# EAGLE board schematic_March8 (EAGLE 9.3.0), part 1 of 2
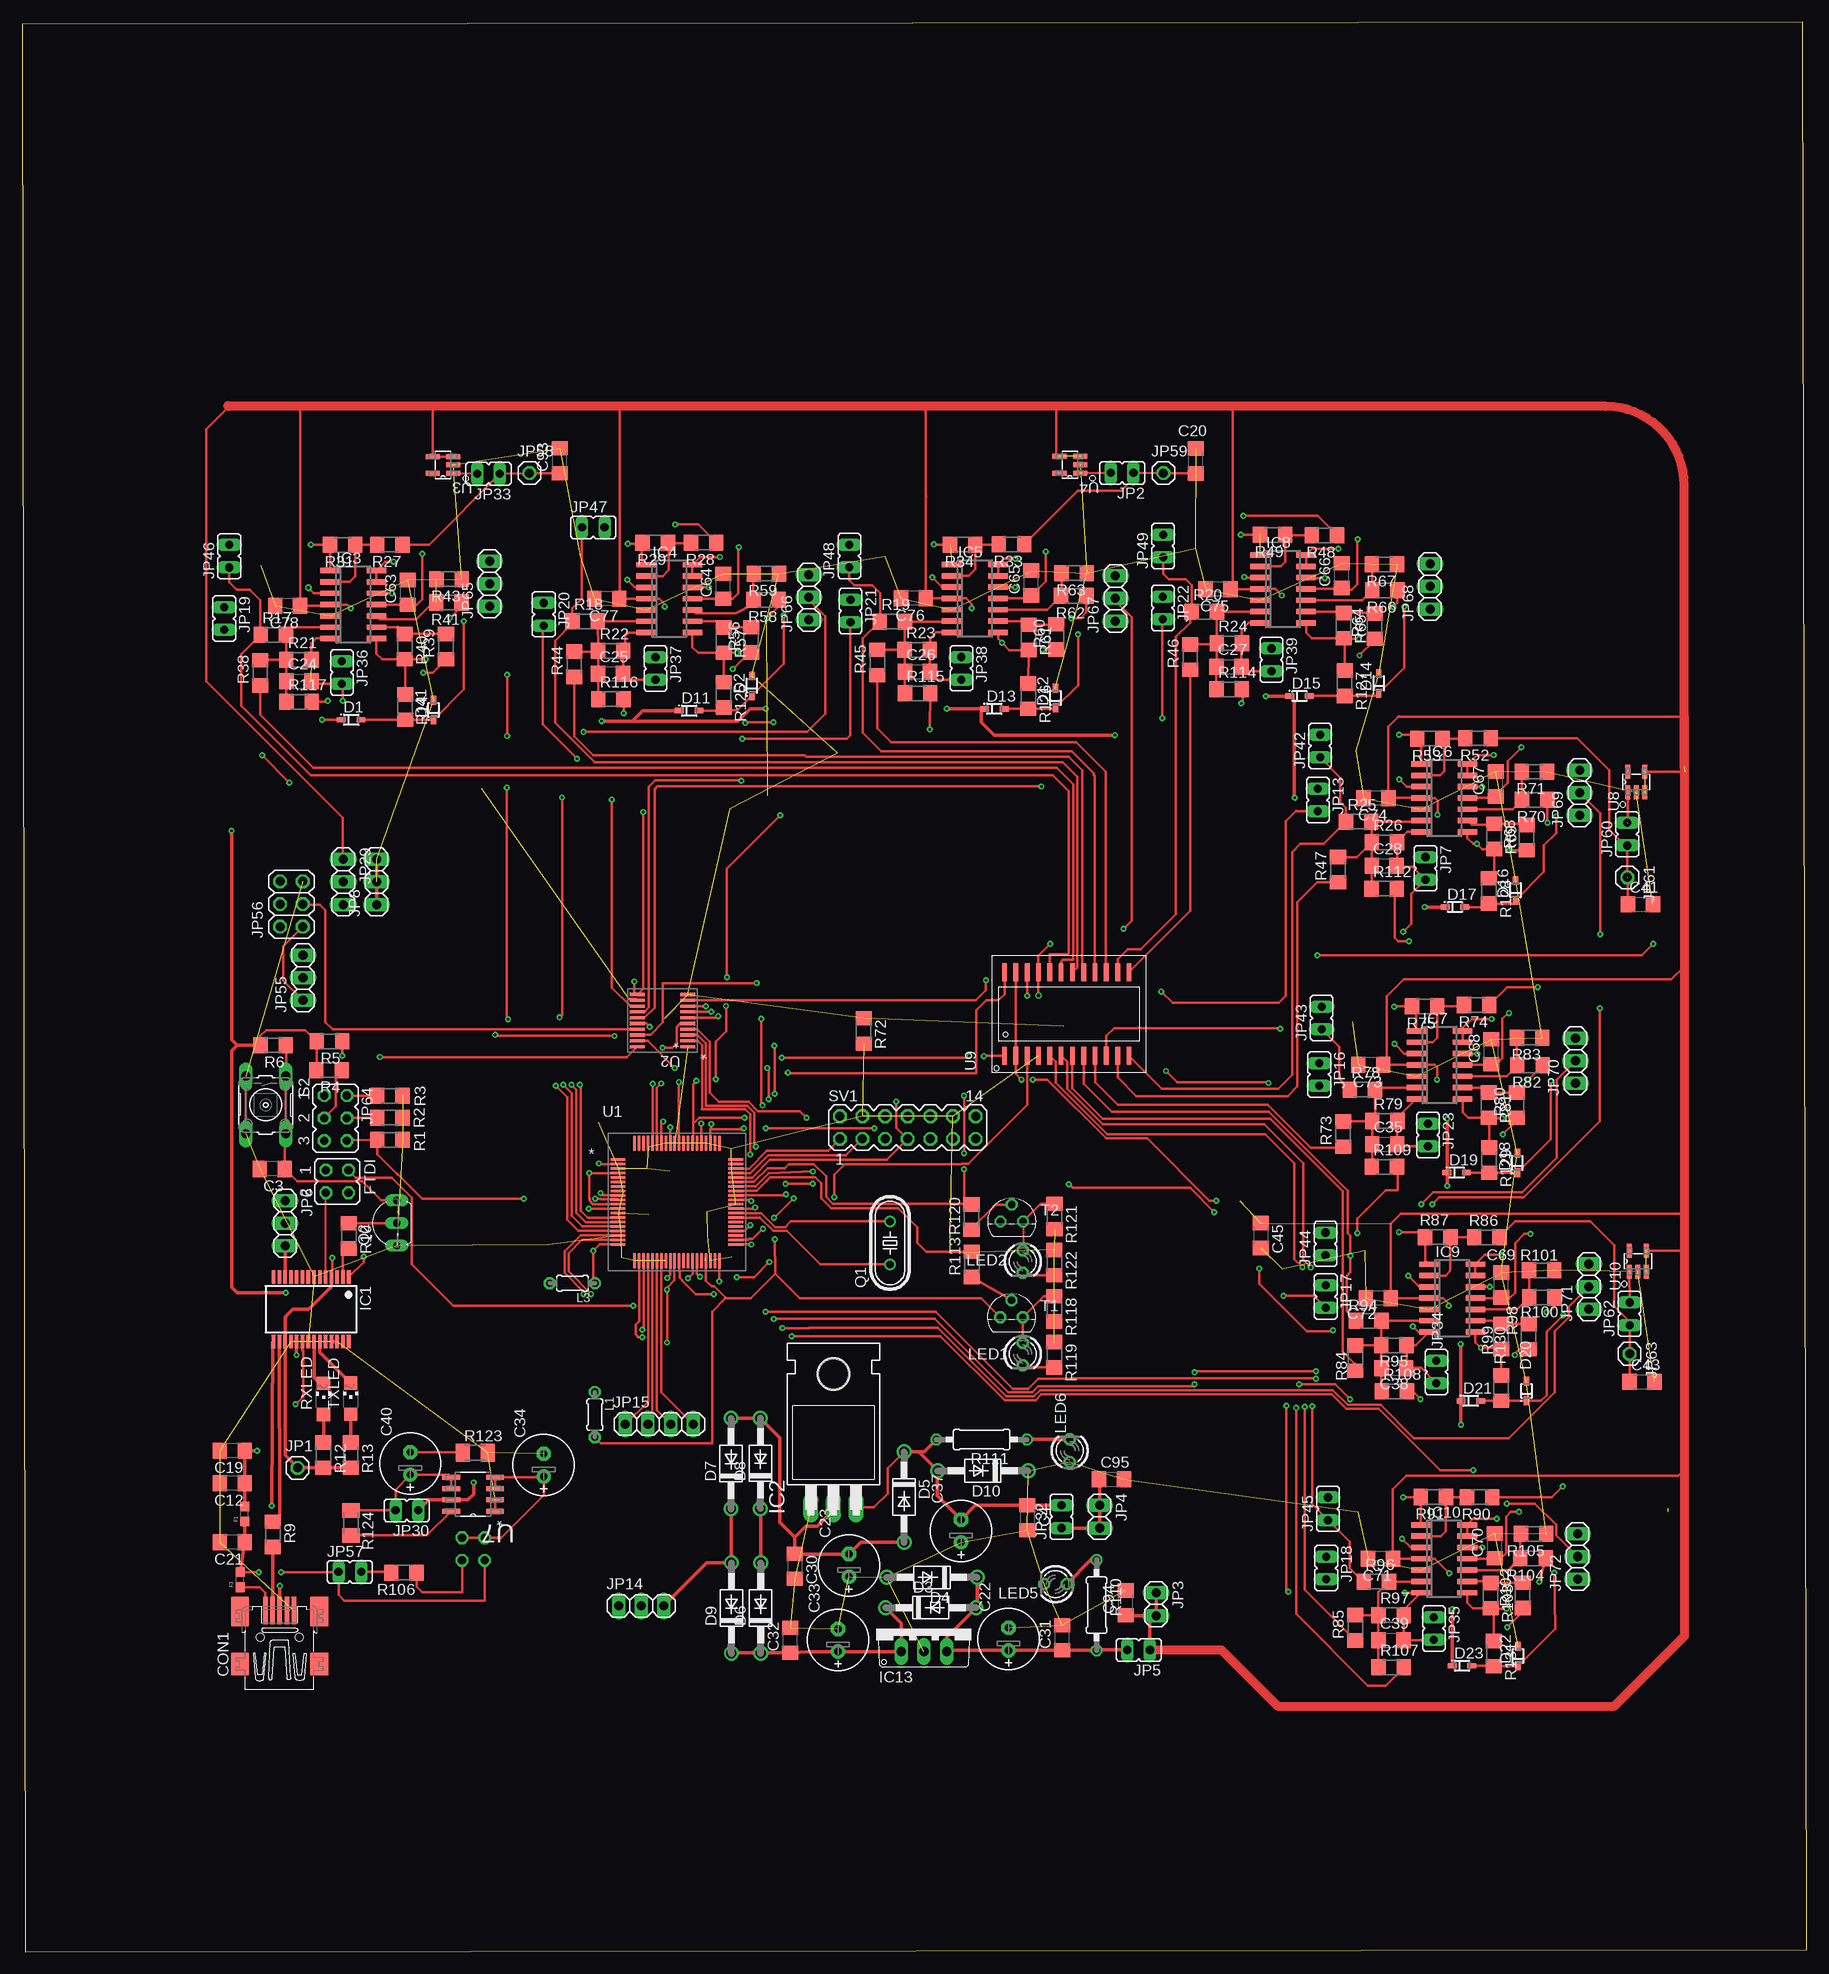
[diagram p0: board, top side]
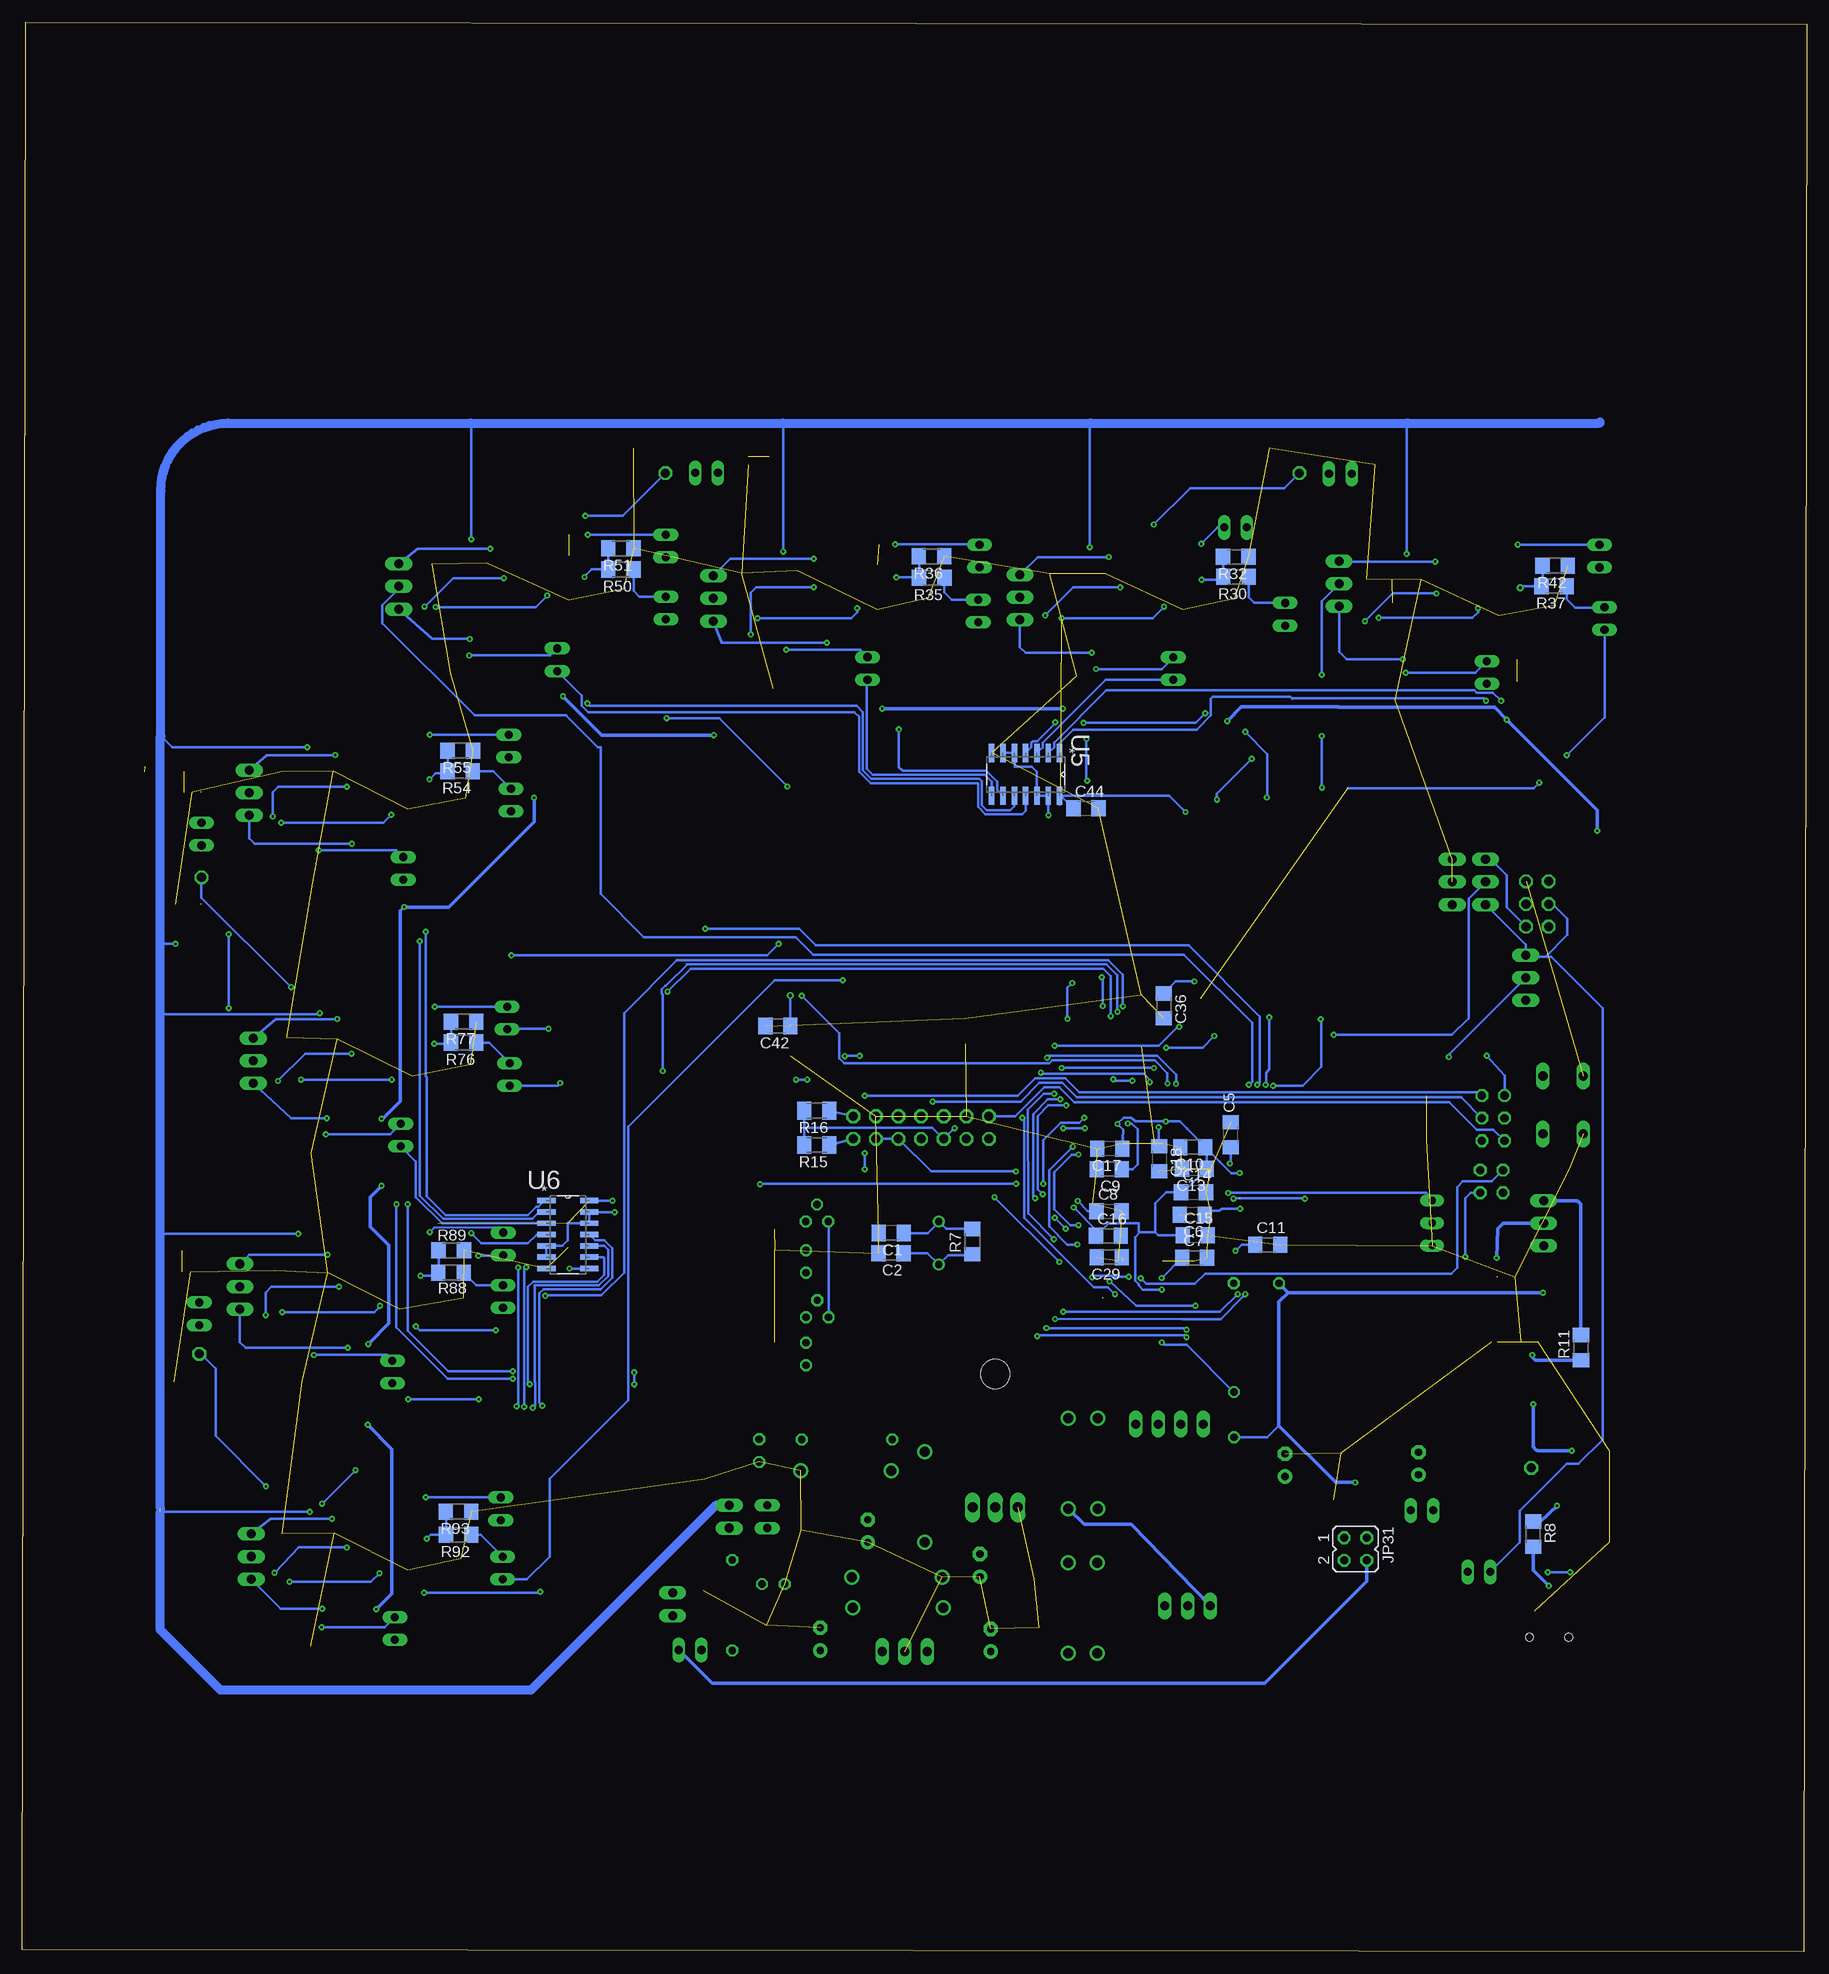
[diagram p1: board, bottom side, seen from below]

Size 200.34 x 216.64 mm. Coordinates in mm from the lower left corner, seen from the top.
Outline: 0.33,0 200.34,0.23 199.93,216.64 0,216.41 0.33,0
Copper layers (1*16): Top 0.035mm / dielectric 1.5mm / Bottom 0.035mm
Design rules "default *": minimum track width 8mil, minimum drill 10mil, track to track 7mil, track to pad 7mil, pad to pad 7mil, via to via 7mil, smd to smd 7mil, copper to edge 10mil, drill to drill 7mil, minimum pad ring 10mil, minimum via ring 8mil, stop-mask expansion 4mil, vias tented up to drill 0mil, thermal gap 10mil
Net classes: 1 power: width 0.254 mm

## Footprints (pad centres in the part's own frame; a part is rotated, then mirrored left to right if it is on the bottom)
C1206 = smd 1.6 x 1.8: 1 -1.4,0; 2 1.4,0
E2,5-7 = drill 0.813 pad 1.6: + -1.27,0 | drill 0.813 pad 1.6 octagon: - 1.27,0
32005-201 = smd 3.1 x 0.5: 1 3,1.6; 2 3,0.8; 3 3,0; 4 3,-0.8; 5 3,-1.6 | smd 2.5 x 2: M1 -3,-4.45; M2 -3,4.45 | smd 3.3 x 2: M3 2.9,4.45; M4 2.9,-4.45 | hole 0.9: 0,2.2; 0,-2.2
SOD323F = smd 1 x 0.6: A 1.1,0; C -1.1,0
DO41-10 = drill 1.118: A 5.08,0; C -5.08,0
0603 = smd 1.1 x 1: 1 -0.85,0; 2 0.85,0
JP2Q = drill 0.914 octagon: 1 -1.27,-1.27; 2 1.27,-1.27; 3 -1.27,1.27; 4 1.27,1.27
SSOP28 = smd 0.4 x 1.5: 1 -4.225,-3.625; 2 -3.575,-3.625; 3 -2.925,-3.625; 4 -2.275,-3.625; 5 -1.625,-3.625; 6 -0.975,-3.625; 7 -0.325,-3.625; 8 0.325,-3.625; 9 0.975,-3.625; 10 1.625,-3.625; 11 2.275,-3.625; 12 2.925,-3.625; 13 3.575,-3.625; 14 4.225,-3.625; 15 4.225,3.625; 16 3.575,3.625; 17 2.925,3.625; 18 2.275,3.625; 19 1.625,3.625; 20 0.975,3.625; 21 0.325,3.625; 22 -0.325,3.625; 23 -0.975,3.625; 24 -1.625,3.625; 25 -2.275,3.625; 26 -2.925,3.625; 27 -3.575,3.625; 28 -4.225,3.625
TO220H = drill 1.118 long: 1 -2.54,-10.16; 2 0,-10.16; 3 2.54,-10.16 | hole 3.302: 0,4.826
SO14 = smd 0.6 x 2.2: 1 -3.81,-2.6; 2 -2.54,-2.6; 3 -1.27,-2.6; 4 0,-2.6; 5 1.27,-2.6; 6 2.54,-2.6; 7 3.81,-2.6; 8 3.81,2.6; 9 2.54,2.6; 10 1.27,2.6; 11 0,2.6; 12 -1.27,2.6; 13 -2.54,2.6; 14 -3.81,2.6
TO220V = drill 1.016 long: 1 -2.54,-2.54; 2 0,-2.54; 3 2.54,-2.54
1X01 = drill 1.016 octagon: 1 0,0
JP1 = drill 0.914 long: 1 0,-1.27; 2 0,1.27
1X02 = drill 1.016 long: 1 -1.27,0; 2 1.27,0
1X03 = drill 1.016 long: 1 -2.54,0; 2 0,0; 3 2.54,0
1X04 = drill 1.016 long: 1 -3.81,0; 2 -1.27,0; 3 1.27,0; 4 3.81,0
2X03 = drill 1.016 octagon: 1 -2.54,-1.27; 2 -2.54,1.27; 3 0,-1.27; 4 0,1.27; 5 2.54,-1.27; 6 2.54,1.27
JP3Q = drill 0.914 octagon: 1 -2.54,-1.27; 2 -2.54,1.27; 3 0,-1.27; 4 0,1.27; 5 2.54,-1.27; 6 2.54,1.27
0204/5 = drill 0.813 octagon: 1 -2.54,0; 2 2.54,0
LED3MM = drill 0.813 octagon: A -1.27,0; K 1.27,0
HC49/S = drill 0.813: 1 -2.413,0; 2 2.413,0
TO92-EBC = drill 0.813 long: B 0,-1.27; C -2.54,-1.27; E 2.54,-1.27
R1206 = smd 1.6 x 1.803: 1 -1.422,0; 2 1.422,0
M1206 = smd 1.6 x 2: 1 -1.4,0; 2 1.4,0
0207/10 = drill 0.813 octagon: 1 -5.08,0; 2 5.08,0
CHIPLED_1206 = smd 1.5 x 1.5: A 0,-1.75; C 0,1.75
B3F-10XX = drill 1.016 long: 1 -3.251,2.261; 2 3.251,2.261; 3 -3.251,-2.261; 4 3.251,-2.261
MA07-2 = drill 1.016 octagon: 1 -7.62,-1.27; 2 -7.62,1.27; 3 -5.08,-1.27; 4 -5.08,1.27; 5 -2.54,-1.27; 6 -2.54,1.27; 7 0,-1.27; 8 0,1.27; 9 2.54,-1.27; 10 2.54,1.27; 11 5.08,-1.27; 12 5.08,1.27; 13 7.62,-1.27; 14 7.62,1.27
TO92 = drill 0.813 octagon: 1 1.27,0; 2 0,1.905; 3 -1.27,0
PN80 = smd 1.676 x 0.279: 1 -6.617,4.75; 2 -6.617,4.25; 3 -6.617,3.75; 4 -6.617,3.25; 5 -6.617,2.75; 6 -6.617,2.25; 7 -6.617,1.75; 8 -6.617,1.25; 9 -6.617,0.75; 10 -6.617,0.25; 11 -6.617,-0.25; 12 -6.617,-0.75; 13 -6.617,-1.25; 14 -6.617,-1.75; 15 -6.617,-2.25; 16 -6.617,-2.75; 17 -6.617,-3.25; 18 -6.617,-3.75; 19 -6.617,-4.25; 20 -6.617,-4.75; 41 6.617,-4.75; 42 6.617,-4.25; 43 6.617,-3.75; 44 6.617,-3.25; 45 6.617,-2.75; 46 6.617,-2.25; 47 6.617,-1.75; 48 6.617,-1.25; 49 6.617,-0.75; 50 6.617,-0.25; 51 6.617,0.25; 52 6.617,0.75; 53 6.617,1.25; 54 6.617,1.75; 55 6.617,2.25; 56 6.617,2.75; 57 6.617,3.25; 58 6.617,3.75; 59 6.617,4.25; 60 6.617,4.75 | smd 0.279 x 1.676: 21 -4.75,-6.617; 22 -4.25,-6.617; 23 -3.75,-6.617; 24 -3.25,-6.617; 25 -2.75,-6.617; 26 -2.25,-6.617; 27 -1.75,-6.617; 28 -1.25,-6.617; 29 -0.75,-6.617; 30 -0.25,-6.617; 31 0.25,-6.617; 32 0.75,-6.617; 33 1.25,-6.617; 34 1.75,-6.617; 35 2.25,-6.617; 36 2.75,-6.617; 37 3.25,-6.617; 38 3.75,-6.617; 39 4.25,-6.617; 40 4.75,-6.617; 61 4.75,6.617; 62 4.25,6.617; 63 3.75,6.617; 64 3.25,6.617; 65 2.75,6.617; 66 2.25,6.617; 67 1.75,6.617; 68 1.25,6.617; 69 0.75,6.617; 70 0.25,6.617; 71 -0.25,6.617; 72 -0.75,6.617; 73 -1.25,6.617; 74 -1.75,6.617; 75 -2.25,6.617; 76 -2.75,6.617; 77 -3.25,6.617; 78 -3.75,6.617; 79 -4.25,6.617; 80 -4.75,6.617
PW20 = smd 1.676 x 0.356: 1 -2.819,2.925; 2 -2.819,2.275; 3 -2.819,1.625; 4 -2.819,0.975; 5 -2.819,0.325; 6 -2.819,-0.325; 7 -2.819,-0.975; 8 -2.819,-1.625; 9 -2.819,-2.275; 10 -2.819,-2.925; 11 2.819,-2.925; 12 2.819,-2.275; 13 2.819,-1.625; 14 2.819,-0.975; 15 2.819,-0.325; 16 2.819,0.325; 17 2.819,0.975; 18 2.819,1.625; 19 2.819,2.275; 20 2.819,2.925
DDC0005A_N = smd 1.575 x 0.559: 1 -1.168,0.95; 2 -1.168,0; 3 -1.168,-0.95; 4 1.168,-0.95; 5 1.168,0.95
SOIC127P600X175-14N = smd 2.057 x 0.61: 1 -4.801,7.62; 2 -4.801,6.35; 3 -4.801,5.08; 4 -4.801,3.81; 5 -4.801,2.54; 6 -4.801,1.27; 7 -4.801,0; 8 0,0; 9 0,1.27; 10 0,2.54; 11 0,3.81; 12 0,5.08; 13 0,6.35; 14 0,7.62
SOIC127P600X175-8N = smd 1.981 x 0.559: 1 -2.464,1.905; 2 -2.464,0.635; 3 -2.464,-0.635; 4 -2.464,-1.905; 5 2.464,-1.905; 6 2.464,-0.635; 7 2.464,0.635; 8 2.464,1.905
21-0042B_24 = smd 1.981 x 0.533: 1 -4.686,6.985; 2 -4.686,5.715; 3 -4.686,4.445; 4 -4.686,3.175; 5 -4.686,1.905; 6 -4.686,0.635; 7 -4.686,-0.635; 8 -4.686,-1.905; 9 -4.686,-3.175; 10 -4.686,-4.445; 11 -4.686,-5.715; 12 -4.686,-6.985; 13 4.686,-6.985; 14 4.686,-5.715; 15 4.686,-4.445; 16 4.686,-3.175; 17 4.686,-1.905; 18 4.686,-0.635; 19 4.686,0.635; 20 4.686,1.905; 21 4.686,3.175; 22 4.686,4.445; 23 4.686,5.715; 24 4.686,6.985

## Placement (x,y rotation side)
C1  36p  [C1206]  102.77,80.7 180 bottom
C2  36p  [C1206]  102.79,78.44 180 bottom
C3  0.1u  [C1206]  28.07,87.88 180 top
C4  0.1uF  [C1206]  112.85,48.72 270 top
C5  2.2u  [C1206]  64.67,91.72 90 bottom
C6  2.2u  [C1206]  68.96,82.75 180 bottom
C7  2.2u  [C1206]  68.71,77.93 0 bottom
C8  2.2u  [C1206]  78.31,83.13 0 bottom
C9  2.2u  [C1206]  78.28,87.86 180 bottom
C10  2.2u  [C1206]  68.91,90.32 180 bottom
C11  2.2u  [C1206]  60.5,79.38 0 bottom
C12  100nF  [C1206]  23.57,52.58 180 top
C13  2.2u  [C1206]  68.73,87.93 180 bottom
C14  2.2u  [C1206]  68.83,85.29 0 bottom
C15  2.2u  [C1206]  68.63,80.44 0 bottom
C16  2.2u  [C1206]  78.38,80.37 0 bottom
C17  2.2u  [C1206]  78.23,90.17 180 bottom
C18  2.2u  [C1206]  72.67,89.03 270 bottom
C19  4.7uF  [C1206]  23.57,56.26 180 top
C20  2.2u  [C1206]  131.75,167.39 90 top
C21  10nF  [C1206]  23.57,45.97 180 top
C22  10uF  [E2,5-7]  110.74,35.1 90 top
C23  1000uF  [E2,5-7]  92.81,43.38 90 top
C24  [C1206]  31.06,142.67 0 top
C25  [C1206]  66.04,143.48 0 top
C26  [C1206]  100.51,143.71 0 top
C27  [C1206]  135.48,144.3 0 top
C28  [C1206]  152.91,121.92 0 top
C29  0.1u  [C1206]  78.28,77.98 180 bottom
C30  0.1uF  [C1206]  86.74,43.28 270 top
C31  0.1uF  [C1206]  116.76,35.26 90 top
C32  0.1uF  [C1206]  86.23,34.98 90 top
C33  1000uF  [E2,5-7]  91.59,34.98 90 top
C34  0.1uF  [E2,5-7]  58.55,54.64 90 top
C35  [C1206]  152.98,90.68 0 top
C36  2.2u  [C1206]  72.16,106.2 270 bottom
C37  10uF  [E2,5-7]  105.41,47.24 90 top
C38  [C1206]  154,65.53 0 top
C39  [C1206]  153.67,34.95 0 top
C40  10uF  [E2,5-7]  43.56,54.81 90 top
C41  2.2u  [C1206]  181.69,117.6 0 top
C42  2.2u  [C1206]  115.49,103.94 180 bottom
C43  2.2u  [C1206]  181.86,63.98 0 top
C44  2.2u  [C1206]  80.9,128.37 0 bottom
C45  2.2u  [C1206]  139.06,80.42 270 top
C63  2.2u  [C1206]  43.28,152.63 90 top
C64  2.2u  [C1206]  78.71,153.31 90 top
C65  2.2u  [C1206]  113.31,153.67 90 top
C66  2.2u  [C1206]  148.16,154.51 90 top
C67  2.2u  [C1206]  165.43,131.11 90 top
C68  2.2u  [C1206]  164.95,101.04 90 top
C69  2.2u  [C1206]  166.04,74.85 90 top
C70  2.2u  [C1206]  165.3,45.57 90 top
C71  2.2u  [C1206]  152.5,44.15 180 top
C72  2.2u  [C1206]  152.25,73.38 180 top
C73  2.2u  [C1206]  151.41,99.57 180 top
C74  2.2u  [C1206]  151.99,129.51 180 top
C75  2.2u  [C1206]  134.26,152.98 180 top
C76  2.2u  [C1206]  100.05,151.94 180 top
C77  2.2u  [C1206]  65.63,151.89 180 top
C78  2.2u  [C1206]  29.79,151.1 180 top
C93  2.2u  [C1206]  60.33,167.41 90 top
C94  2.2u  [C1206]  123.88,39.17 90 top
C95  2.2u  [C1206]  122.3,53.04 0 top
CON1  UBC05V128-B0C04D  [32005-201]  28.91,35.31 90 top
D1  1N914BWS  [SOD323F]  36.93,138.33 0 top
D2  1N914BWS  [SOD323F]  81.91,142.14 90 top
D3  1N4004  [DO41-10]  102.01,38.63 0 top
D4  1N4004  [DO41-10]  102.13,42.04 180 top
D5  1N4004  [DO41-10]  99.01,51.05 270 top
D6  1N4004  [DO41-10]  82.91,38.58 90 top
D7  1N4004  [DO41-10]  79.58,54.81 90 top
D8  1N4004  [DO41-10]  82.88,54.84 90 top
D9  1N4004  [DO41-10]  79.63,38.58 90 top
D10  1N4004  [DO41-10]  107.85,54 180 top
D11  1N914BWS  [SOD323F]  74.88,139.34 0 top
D12  1N914BWS  [SOD323F]  116,140.77 90 top
D13  1N914BWS  [SOD323F]  109.14,139.55 0 top
D14  1N914BWS  [SOD323F]  152.3,142.42 90 top
D15  1N914BWS  [SOD323F]  143.41,141 0 top
D16  1N914BWS  [SOD323F]  167.67,119.18 90 top
D17  1N914BWS  [SOD323F]  160.86,117.3 0 top
D18  1N914BWS  [SOD323F]  167.87,88.54 90 top
D19  1N914BWS  [SOD323F]  161.06,87.48 0 top
D20  1N914BWS  [SOD323F]  168.88,62.97 90 top
D21  1N914BWS  [SOD323F]  162.64,61.85 0 top
D22  1N914BWS  [SOD323F]  167.94,33.2 90 top
D23  1N914BWS  [SOD323F]  161.65,32.11 0 top
D41  1N914BWS  [SOD323F]  46.18,139.42 90 top
F1  500mA  [0603]  24.97,49.15 90 top
F3  500mA  [0603]  24.46,41.78 90 top
FTDI  [JP2Q]  35.36,86.49 270 top
IC1  FT232RL  [SSOP28]  32.44,72.14 180 top
IC2  [TO220H]  91.08,60.05 0 top
IC3  TL084D  [SO14]  37.16,151.26 270 top
IC4  TL084D  [SO14]  72.64,151.92 270 top
IC5  TL084D  [SO14]  106.96,151.94 270 top
IC6  TL084D  [SO14]  159.66,129.54 270 top
IC7  TL084D  [SO14]  159.13,99.57 270 top
IC8  TL084D  [SO14]  141.55,153.01 270 top
IC9  TL084D  [SO14]  160.55,73.38 270 top
IC10  TL084D  [SO14]  159.64,44.12 270 top
IC13  7805TV  [TO220V]  101.24,36.25 0 top
JP1  [1X01]  30.91,54.33 0 top
JP2  [JP1]  123.49,166.04 90 top
JP3  [1X02]  127.3,39.01 270 top
JP4  [1X02]  120.95,48.84 270 top
JP5  [JP1]  125.35,33.88 90 top
JP6  [1X03]  29.51,81.79 270 top
JP7  [JP1]  157.56,121.64 180 top
JP8  [1X03]  39.78,120.12 90 top
JP13  [JP1]  145.47,129.31 180 top
JP14  [1X03]  69.49,38.84 0 top
JP15  [1X04]  71.53,59.23 0 top
JP16  [JP1]  145.62,98.5 180 top
JP17  [JP1]  146.35,73.56 180 top
JP18  [JP1]  146.41,43.08 180 top
JP19  [JP1]  22.68,149.68 180 top
JP20  [JP1]  58.55,150.16 180 top
JP21  [JP1]  92.99,150.55 180 top
JP22  [JP1]  128.07,150.88 180 top
JP23  [JP1]  157.84,91.69 180 top
JP29  [1X03]  36.04,120.12 270 top
JP30  [JP1]  43.18,49.56 90 top
JP31  [JP2Q]  50.65,45.21 270 bottom
JP32  [JP1]  116.69,48.84 0 top
JP33  [JP1]  52.35,165.94 90 top
JP34  pls  [JP1]  158.78,65.1 180 top
JP35  [JP1]  158.5,36.3 180 top
JP36  [JP1]  35.89,143.64 180 top
JP37  [JP1]  71.09,144.07 180 top
JP38  [JP1]  105.44,144.09 180 top
JP39  [JP1]  140.26,145.06 180 top
JP42  [JP1]  145.72,135.38 0 top
JP43  [JP1]  145.9,104.83 0 top
JP44  Int_inp  [JP1]  146.33,79.48 0 top
JP45  [JP1]  146.61,49.73 0 top
JP46  [JP1]  23.24,156.69 0 top
JP47  [JP1]  64.11,159.92 270 top
JP48  [JP1]  92.86,156.72 0 top
JP49  [JP1]  128.09,157.84 0 top
JP55  [1X03]  31.52,109.35 90 top
JP56  [2X03]  30.23,117.63 90 top
JP57  [JP1]  36.78,42.65 270 top
JP58  [1X01]  56.95,166.01 0 top
JP59  [1X01]  128.12,166.01 0 top
JP60  [JP1]  180.21,125.48 0 top
JP61  [1X01]  180.21,120.62 270 top
JP62  [JP1]  180.47,71.63 0 top
JP63  [1X01]  180.47,67.13 270 top
JP64  [JP3Q]  35.18,93.6 270 top
JP65  [1X03]  52.48,153.59 90 top
JP66  [1X03]  88.32,152.07 90 top
JP67  [1X03]  122.73,151.94 90 top
JP68  [1X03]  158.06,153.29 90 top
JP69  [1X03]  174.85,130.12 90 top
JP70  [1X03]  174.4,100.03 90 top
JP71  [1X03]  175.89,74.68 90 top
JP72  [1X03]  174.62,44.37 90 top
L1  BKP1005HS221-T  [0204/5]  64.29,60.3 270 top
L3  BKP1005HS221-T  [0204/5]  61.77,75.06 180 top
LED1  [LED3MM]  112.34,67.11 270 top
LED2  [LED3MM]  112.34,77.5 270 top
LED5  [LED3MM]  116,41.28 180 top
LED6  [LED3MM]  117.6,56.26 90 top
Q1  [HC49/S]  97.43,79.58 90 top
Q2  BC557  [TO92-EBC]  40.77,81.81 90 top
R1  2.2k  [R1206]  41.27,91.16 180 top
R2  2.2k  [R1206]  41.27,93.65 180 top
R3  2.2k  [R1206]  41.27,96.09 180 top
R4  820  [R1206]  34.44,98.98 180 top
R5  820  [R1206]  34.49,102.21 180 top
R6  2.2k  [R1206]  28.17,101.78 180 top
R7  1M  [R1206]  93.65,79.73 90 bottom
R8  33  [R1206]  30.68,46.89 270 bottom
R9  33  [R1206]  28.14,46.86 270 top
R10  2.2k  [R1206]  36.68,80.37 270 top
R11  10k  [R1206]  25.32,67.82 90 bottom
R12  270  [R1206]  33.81,55.75 270 top
R13  270  [R1206]  36.88,55.75 270 top
R14  [R1206]  42.98,139.75 270 top
R15  4.7k  [M1206]  111.12,90.58 180 bottom
R16  4.7k  [M1206]  111.12,94.44 180 bottom
R17  [R1206]  28.19,147.85 0 top
R18  [R1206]  63.2,149.38 0 top
R19  [R1206]  97.69,149.35 0 top
R20  [R1206]  132.72,150.44 0 top
R21  [R1206]  31.06,145.06 0 top
R22  [R1206]  66.07,146.05 0 top
R23  [R1206]  100.48,146.18 0 top
R24  [R1206]  135.53,146.91 0 top
R25  [R1206]  150.04,126.87 0 top
R26  [R1206]  152.93,124.56 0 top
R27  [R1206]  41.27,157.99 180 top
R28  [R1206]  76.5,158.22 180 top
R29  [R1206]  71.07,158.22 180 top
R30  [R1206]  64.06,154.36 180 bottom
R31  [R1206]  35.97,157.96 180 top
R32  [R1206]  64.08,156.62 180 bottom
R33  [R1206]  111.07,158.01 180 top
R34  [R1206]  105.59,157.99 180 top
R35  [R1206]  98.22,154.25 180 bottom
R36  [R1206]  98.25,156.67 180 bottom
R37  [R1206]  28.35,153.31 180 bottom
R38  [R1206]  26.72,143.59 90 top
R39  [R1206]  47.57,146.53 90 top
R40  [R1206]  42.95,146.53 270 top
R41  [R1206]  47.9,151.49 180 top
R42  [R1206]  28.22,155.63 180 bottom
R43  [R1206]  47.93,154.1 180 top
R44  [R1206]  61.98,144.55 90 top
R45  [R1206]  96.01,144.75 90 top
R46  [R1206]  131.14,145.36 90 top
R47  [R1206]  147.73,121.49 90 top
R48  [R1206]  146.2,159.03 180 top
R49  [R1206]  140.39,159.08 180 top
R50  [R1206]  133.12,155.19 180 bottom
R51  [R1206]  133.12,157.56 180 bottom
R52  [R1206]  163.45,136.25 180 top
R53  [R1206]  158.04,136.19 180 top
R54  [R1206]  151.18,132.56 180 bottom
R55  [R1206]  151.16,134.85 180 bottom
R56  [R1206]  81.84,147.29 90 top
R57  [R1206]  78.74,147.27 270 top
R58  [R1206]  83.52,151.79 180 top
R59  [R1206]  83.54,154.74 180 top
R60  [R1206]  116.1,147.62 90 top
R61  [R1206]  113,147.57 270 top
R62  [R1206]  118.06,152.22 180 top
R63  [R1206]  118.11,154.79 180 top
R64  [R1206]  151.84,148.84 90 top
R65  [R1206]  148.36,148.89 270 top
R66  [R1206]  152.98,152.86 180 top
R67  [R1206]  152.93,155.78 180 top
R68  [R1206]  168.91,125.09 90 top
R69  [R1206]  165.25,125.22 270 top
R70  [R1206]  169.82,129.34 180 top
R71  [R1206]  169.77,132.49 180 top
R72  0  [R1206]  94.46,103.38 270 top
R73  [R1206]  148.31,91.8 90 top
R74  [R1206]  163.3,106.3 180 top
R75  [R1206]  157.45,106.15 180 top
R76  [R1206]  150.77,102.08 180 bottom
R77  [R1206]  150.77,104.42 180 bottom
R78  [R1206]  150.47,96.8 0 top
R79  [R1206]  152.98,93.27 0 top
R80  [R1206]  167.79,95.05 90 top
R81  [R1206]  164.64,95.05 270 top
R82  [R1206]  169.29,99.52 180 top
R83  [R1206]  169.24,102.64 180 top
R84  [R1206]  149.68,66.65 90 top
R85  [R1206]  149.68,36.37 90 top
R86  [R1206]  164.44,80.21 180 top
R87  [R1206]  158.93,80.24 180 top
R88  [R1206]  152.2,76.25 180 bottom
R89  [R1206]  152.17,78.74 180 bottom
R90  [R1206]  163.63,51.03 180 top
R91  [R1206]  158.45,51.05 180 top
R92  [R1206]  151.33,46.81 180 bottom
R93  [R1206]  151.36,49.4 180 bottom
R94  [R1206]  151.18,70.84 0 top
R95  [R1206]  154,68.07 0 top
R96  [R1206]  152.04,41.55 0 top
R97  [R1206]  153.7,37.8 0 top
R98  [R1206]  169.14,69.06 90 top
R99  [R1206]  166.04,69.09 270 top
R100  [R1206]  170.61,73.46 180 top
R101  [R1206]  170.59,76.5 180 top
R102  [R1206]  168.45,40 90 top
R103  [R1206]  164.87,39.98 270 top
R104  [R1206]  169.62,44.17 180 top
R105  [R1206]  169.7,46.91 180 top
R106  0  [R1206]  42.85,42.57 180 top
R107  [R1206]  153.7,31.93 0 top
R108  [R1206]  154.05,62.92 0 top
R109  [R1206]  152.93,88.11 0 top
R110  1K  [0207/10]  120.62,38.91 270 top
R111  1K  [0207/10]  107.72,57.51 180 top
R112  [R1206]  152.91,119.35 0 top
R113  470  [R1206]  106.63,77.17 90 top
R114  [R1206]  135.51,141.73 0 top
R115  [R1206]  100.53,141.27 0 top
R116  [R1206]  66.09,140.64 0 top
R117  [R1206]  31.09,140.34 0 top
R118  10k  [R1206]  115.87,72.19 270 top
R119  470  [R1206]  115.87,67.03 270 top
R120  470  [R1206]  106.58,82.47 90 top
R121  10k  [R1206]  115.9,82.55 270 top
R122  470  [R1206]  115.87,77.37 270 top
R123  1  [M1206]  50.85,56.01 0 top
R124  1  [M1206]  36.91,48.13 270 top
R125  [R1206]  78.74,141.12 270 top
R126  [R1206]  112.95,140.97 270 top
R127  [R1206]  148.46,142.42 270 top
R128  [R1206]  164.67,119.1 270 top
R129  [R1206]  164.69,88.87 270 top
R130  [R1206]  166.04,63.27 270 top
R131  [R1206]  165.23,33.48 270 top
RXLED  [CHIPLED_1206]  33.83,62.08 0 top
S2  [B3F-10XX]  27.33,95.07 270 top
SV1  JTAG  [MA07-2]  99.42,92.53 0 top
T1  BC547  [TO92]  111.07,71.25 0 top
T2  BC547  [TO92]  111.1,81.99 0 top
TXLED  [CHIPLED_1206]  36.88,62.1 0 top
U1  TMS320F28069_PN_80  [PN80]  73.51,84.18 0 top
U2  TLV5610_PW_20  [PW20]  71.88,104.55 180 top
U3  REF2030AIDDCR  [DDC0005A_N]  47.24,166.93 180 top
U4  REF2030AIDDCR  [DDC0005A_N]  117.63,166.95 180 top
U5  TS12A44514DR  [SOIC127P600X175-14N]  91.49,129.79 270 bottom
U6  TS12A44514DR  [SOIC127P600X175-14N]  136.68,76.71 0 bottom
U7  TPS7333QD  [SOIC127P600X175-8N]  50.62,51.36 180 top
U8  REF2030AIDDCR  [DDC0005A_N]  181.23,131.34 90 top
U9  MAX395CWG+  [21-0042B_24]  117.27,105.28 90 top
U10  REF2030AIDDCR  [DDC0005A_N]  181.41,77.52 90 top

## Library data of the parts
C1-C3 C5-C23 C29 C33 C34 C36 C37 C40-C45 C63-C78 C93-C95 R1-R13 R106 R110 R111 R113 R118-R122 = resistor
C4 C24-C28 C30-C32 C35 C38 C39 L1 L3 R14-R105 R107-R109 R112 R114-R117 R123-R131 = rcl
CON1 = con-cypressindustries; OC_FARNELL: unknown; OC_NEWARK: unknown
D1 D2 D11-D23 D41 = many_diodes
D3-D10 = diode
F1 F3 = SparkFun
FTDI JP2 JP5 JP7 JP13 JP16-JP23 JP30-JP39 JP42-JP49 JP57 JP60 JP62 JP64 = jumper
IC1 = ftdichip; MPN: FT232RL; OC_FARNELL: 1146032; OC_NEWARK: 91K9918
IC2-IC10 IC13 = linear
JP1 JP3 JP4 JP6 JP8 JP14 JP15 JP29 JP55 JP56 JP58 JP59 JP61 JP63 JP65-JP72 = pinhead
LED1 LED2 LED5 LED6 RXLED TXLED = led
Q1 = crystal; OC_FARNELL: 1667008; OC_NEWARK: unknown
Q2 = transistor-pnp
S2 = switch-omron; MPN: B3F-1000; OC_FARNELL: 176432; OC_NEWARK: 36M3542
SV1 = con-lstb; OC_FARNELL: unknown; OC_NEWARK: unknown
T1 T2 = transistor-neu-to92
U1 = uP; MANUFACTURER_PART_NUMBER: tms320f28069_pn_80; VENDOR: Texas Instruments
U2 = TLV5610; MANUFACTURER_PART_NUMBER: tlv5610_pw_20; VENDOR: Texas Instruments
U3 U4 U8 U10 = ref2030
U5 U6 = Texas Instruments_By_element14_Batch_1; MPN: TS12A44514DR; OC_FARNELL: 1755398; OC_NEWARK: 95M0176; PACKAGE: SOIC-14; SUPPLIER: Texas Instruments
U7 = Texas Instruments_By_element14_Batch_1; MPN: TPS7333QD; OC_FARNELL: -; OC_NEWARK: 52F2803; PACKAGE: SOIC-8; SUPPLIER: Texas Instruments
U9 = MAX395; MANUFACTURER_PART_NUMBER: MAX395CWG+; VENDOR: Maxim Integrated Products

## Nets
3V3_OUT: IC1.4 IC1.17 JP1.1 JP6.2 R12.2 R13.2
+1.5V1: C93.1 JP33.1 JP58.1 R27.1 R28.1
+1.5V2: C20.1 JP2.1 JP59.1 R33.1 R48.1
+1.5V3: C41.1 JP60.1 JP61.1 R52.1 R74.1
+1.5V4: C43.1 JP62.1 JP63.1 R86.1 R90.1
+3V3: C29.1 D1.C D11.C D13.C D15.C D17.C D19.C D21.C D23.C JP30.1 L1.2 L3.2 R4.2 R5.2 R6.2 T1.3 T2.3 U1.37 U2.16 U7.7
+5V: C36.1 C44.1 C45.1 C71.1 C72.1 C73.1 C74.1 C75.1 C76.1 C77.1 C78.1 C94.1 IC3.4 IC4.4 IC5.4 IC6.4 IC7.4 IC8.4 IC9.4 IC10.4 JP3.1 JP3.2 JP5.1 JP29.1 JP31.4 JP55.1 JP56.1 R41.1 R58.1 R62.1 R66.1 R70.1 R82.1 R100.1 R104.1 R106.1 U2.11 U3.3 U3.4 U4.3 U4.4 U5.14 U6.14 U8.3 U8.4 U9.2 U9.23 U10.3 U10.4
-5V: C42.1 C63.1 C64.1 C65.1 C66.1 C67.1 C68.1 C69.1 C70.1 C95.1 IC3.11 IC4.11 IC5.11 IC6.11 IC7.11 IC8.11 IC9.11 IC10.11 JP4.1 JP4.2 JP32.1 U9.21
?????: JP56.3 U2.17
ADCINA0: JP69.2 U1.19
ADCINA1: JP70.2 U1.18
ADCINA2: JP65.2 U1.17
ADCINA4: JP66.2 U1.16
ADCINA5: JP67.2 U1.15
ADCINA6: JP68.2 U1.14
ADCINB0: JP72.2 U1.22
ADCINB1: JP71.2 U1.23
ADCINB2: JP15.1 U1.24
ADCINB4: JP15.2 U1.25
ADCINB5: JP15.3 U1.26
ADCINB6: JP15.4 U1.27
AGND: C4.2 C20.2 C22.- C23.+ C30.2 C31.2 C32.2 C33.- C36.2 C37.+ C41.2 C42.2 C43.2 C44.2 C45.2 C63.2 C64.2 C65.2 C66.2 C67.2 C68.2 C69.2 C70.2 C71.2 C72.2 C73.2 C74.2 C75.2 C76.2 C77.2 C78.2 C93.2 C94.2 C95.2 D2.A D4.A D10.C D12.A D14.A D16.A D18.A D20.A D22.A D41.A IC2.1 IC3.5 IC4.5 IC5.5 IC6.5 IC7.5 IC8.5 IC9.5 IC10.5 IC13.2 JP8.1 JP8.2 JP8.3 LED5.K LED6.A R32.1 R36.1 R42.1 R43.1 R51.1 R55.1 R59.1 R63.1 R67.1 R71.1 R72.1 R77.1 R83.1 R89.1 R93.1 R101.1 R105.1 U2.10 U3.2 U4.2 U5.7 U6.7 U8.2 U10.2
BUFIN1: D1.A D41.C IC3.12 R14.2
BUFIN2: D2.C D11.A IC4.12 R125.2
BUFIN3: D12.C D13.A IC5.12 R126.2
BUFIN4: D14.C D15.A IC8.12 R127.2
BUFIN5: D16.C D17.A IC6.12 R128.2
BUFIN6: D18.C D19.A IC7.12 R129.2
BUFIN7: D20.C D21.A IC9.12 R130.2
BUFIN8: D22.C D23.A IC10.12 R131.2
CBUS4: IC1.12 JP6.3
D+: IC1.15 R8.1
D-: IC1.16 R9.1
DACDIN: U1.44 U2.2
DACDOUT: U1.42 U2.19
DACO1: JP19.2 U2.12
DACO2: JP20.2 U2.13
DACO3: JP21.2 U2.14
DACO4: JP22.2 U2.15
DACO5: JP13.2 U2.6
DACO6: JP16.2 U2.7
DACO7: JP17.2 U2.8
DACO8: JP18.2 U2.9
DTR_RESET: Q2.B R10.1
FS: U1.31 U2.4
GND: C1.2 C2.2 C3.2 C5.2 C6.2 C7.2 C8.2 C9.2 C10.2 C11.2 C12.2 C13.2 C14.2 C15.2 C16.2 C17.2 C18.2 C19.2 C21.2 C29.2 C34.- CON1.5 IC1.7 IC1.18 IC1.21 IC1.25 IC1.26 JP56.5 Q2.C R1.1 R2.1 R3.1 R72.2 R118.2 R119.1 R121.2 R122.1 R123.2 S2.3 S2.4 SV1.4 SV1.8 SV1.10 SV1.12 U1.3 U1.13 U1.21 U1.28 U1.38 U1.50 U1.64 U1.71 U1.73 U2.1 U7.1 U7.2 U9.4
GPIO34: JP64.2 R3.2 R120.2 U1.55
IDK: C22.+ C31.1 D3.A D4.C IC13.3 JP5.2 R110.2
IDK2: C4.1 C37.- D5.C D10.A IC2.3 JP32.2 R111.2
IN1: JP19.1 R37.1
IN2: JP20.1 R30.1
IN3: JP21.1 R35.1
IN4: JP22.1 R50.1
IN5: JP13.1 R54.1
IN6: JP16.1 R76.1
IN7: JP17.1 R88.1
IN8: JP18.1 R92.1
INT_CONTROL: U1.67 U5.5 U5.6 U5.12 U5.13 U6.5 U6.6 U6.12 U6.13
INTINP1: JP46.1 R17.1 U9.20
INTINP2: JP47.1 R18.1 U9.18
INTINP3: JP48.1 R19.1 U9.16
INTINP4: JP49.1 R20.1 U9.14
INTINP5: JP42.1 R25.1 U9.12
INTINP6: JP43.1 R78.1 U9.10
INTINP7: JP44.1 R94.1 U9.8
INTINP8: JP45.1 R96.1 U9.6
INTSWITCH1: R117.2 U5.2
INTSWITCH2: R116.2 U5.4
INTSWITCH3: R115.2 U5.9
INTSWITCH4: R114.2 U5.10
INTSWITCH5: R112.2 U6.2
INTSWITCH6: R109.2 U6.4
INTSWITCH7: R108.2 U6.9
INTSWITCH8: R107.2 U6.10
JTAG_TRST: JP64.5 SV1.2
LDACBAR: U1.52 U2.18
LED1: R113.2 U1.53
LIMO1: IC3.13 IC3.14 JP65.3
LIMO2: IC4.13 IC4.14 JP66.3
LIMO3: IC5.13 IC5.14 JP67.3
LIMO4: IC8.13 IC8.14 JP68.3
LIMO5: IC6.13 IC6.14 JP69.3
LIMO6: IC7.13 IC7.14 JP70.3
LIMO7: IC9.13 IC9.14 JP71.3
LIMO8: IC10.13 IC10.14 JP72.3
N$1: C5.1 U1.2
N$2: C6.1 U1.12
N$3: C7.1 U1.29
N$4: C8.1 U1.51
N$5: C9.1 U1.65
N$6: IC1.2 R10.2
N$7: C11.1 L3.1 U1.20
N$8: C18.1 U1.72
N$9: JP64.1 R5.1
N$10: JP64.3 R4.1
N$11: CON1.2 R9.2
N$12: CON1.3 R8.2
N$13: IC1.19 R11.1
N$14: IC1.22 RXLED.C
N$15: IC1.23 TXLED.C
N$16: R12.1 RXLED.A
N$17: R13.1 TXLED.A
N$20: C25.1 IC4.6 R18.2 R22.1 R44.2 R116.1
N$21: C26.1 IC5.6 R19.2 R23.1 R45.2 R115.1
N$22: C27.1 IC8.6 R20.2 R24.1 R46.2 R114.1
N$23: IC4.2 R28.2 R29.1
N$24: R15.1 SV1.13
N$25: R16.1 SV1.14
N$26: IC4.3 R30.2 R32.2
N$28: C24.1 IC3.6 R17.2 R21.1 R38.2 R117.1
N$29: IC3.2 R27.2 R31.1
N$30: C28.1 IC6.6 R25.2 R26.1 R47.2 R112.1
N$31: IC5.2 R33.2 R34.1
N$33: IC3.3 R37.2 R42.2
N$35: IC5.3 R35.2 R36.2
N$36: IC3.9 R39.2 R40.1
N$38: IC3.10 R41.2 R43.2
N$39: IC8.2 R48.2 R49.1
N$40: IC8.3 R50.2 R51.2
N$41: IC7.2 R74.2 R75.1
N$42: IC6.2 R52.2 R53.1
N$44: IC6.3 R54.2 R55.2
N$45: IC7.3 R76.2 R77.2
N$47: IC4.9 R56.2 R57.1
N$48: IC4.10 R58.2 R59.2
N$49: IC5.9 R60.2 R61.1
N$50: IC5.10 R62.2 R63.2
N$51: IC8.9 R64.2 R65.1
N$52: IC8.10 R66.2 R67.2
N$53: IC6.9 R68.2 R69.1
N$54: IC6.10 R70.2 R71.2
N$55: C35.1 IC7.6 R73.2 R78.2 R79.1 R109.1
N$56: IC7.9 R80.2 R81.1
N$57: IC7.10 R82.2 R83.2
N$58: IC9.2 R86.2 R87.1
N$59: IC9.3 R88.2 R89.2
N$60: IC10.2 R90.2 R91.1
N$61: IC10.3 R92.2 R93.2
N$62: C38.1 IC9.6 R84.2 R94.2 R95.1 R108.1
N$63: C39.1 IC10.6 R85.2 R96.2 R97.1 R107.1
N$64: IC9.9 R98.2 R99.1
N$65: IC9.10 R100.2 R101.2
N$66: IC10.9 R102.2 R103.1
N$67: IC10.10 R104.2 R105.2
N$73: C32.1 C33.+ D3.C D6.C D9.C IC13.1
N$77: C40.+ JP30.2 R124.1 U7.5 U7.6
N$78: C40.- R123.1
N$80: LED6.K R111.1
N$81: C34.+ JP31.1 JP31.3 U7.3 U7.4
N$82: LED5.A R110.1
N$83: CON1.1 F3.1
N$86: C23.- C30.1 D5.A D7.A D8.A IC2.2
N$91: JP33.2 U3.1
N$95: JP6.1 R11.2
N$102: R113.1 T1.2
N$104: LED1.A R118.1 T1.1
N$105: LED1.K R119.2
N$106: R120.1 T2.2
N$107: LED2.A R121.1 T2.1
N$108: LED2.K R122.2
N$131: JP55.2 U2.20
N$132: JP2.2 U4.1
N$133: JP29.2 U2.5
N$134: JP57.2 R106.2
N$135: JP60.2 U8.1
N$136: JP62.2 U10.1
OUT1: IC3.8 JP65.1 R14.1 R40.2
OUT2: IC4.8 JP66.1 R57.2 R125.1
OUT3: IC5.8 JP67.1 R61.2 R126.1
OUT4: IC8.8 JP68.1 R65.2 R127.1
OUT5: IC6.8 JP69.1 R69.2 R128.1
OUT6: IC7.8 JP70.1 R81.2 R129.1
OUT7: IC9.8 JP71.1 R99.2 R130.1
OUT8: IC10.8 JP72.1 R103.2 R131.1
PLS1: JP36.1 R39.1
PLS2: JP37.1 R56.1
PLS3: JP38.1 R60.1
PLS4: JP39.1 R64.1
PLS5: JP7.1 R68.1
PLS6: JP23.1 R80.1
PLS7: JP34.1 R98.1
PLS8: JP35.1 R102.1
RES: R124.2 U7.8
RESET#: C3.1 Q2.E R6.1 S2.1 S2.2 U1.9
RXD: FTDI.2 IC1.5
SPIBCLK: U1.76 U9.1
SPIBMISO: U1.75 U9.22
SPIBMOSI: U1.35 U9.3
SPIBSS: U1.70 U9.24
SPICLK: U1.41 U2.3
SV1-1: D7.C D9.A JP14.3
SV1-2: JP14.2
SV1-3: D6.A D8.C JP14.1
SWITCH1: R38.1 U9.19
SWITCH2: R44.1 U9.17
SWITCH3: R45.1 U9.15
SWITCH4: R46.1 U9.13
SWITCH5: R47.1 U9.11
SWITCH6: R73.1 U9.9
SWITCH7: R84.1 U9.7
SWITCH8: R85.1 U9.5
TCK: SV1.9 SV1.11 U1.54
TDI: SV1.3 U1.57
TDO: JP64.4 R2.2 SV1.7 U1.56
TMS: SV1.1 U1.58
TMS_RXD: FTDI.3 U1.40
TMS_TXD: FTDI.1 U1.34
TRST: JP64.6 R1.2 U1.10
TXD: FTDI.4 IC1.1
USB_VCC: C21.1 F1.1 F3.2 JP29.3 JP31.2 JP55.3 JP56.4 JP57.1
VCC [power]: C12.1 C19.1 F1.2 IC1.20
VDDIO: C10.1 C13.1 C14.1 C15.1 C16.1 C17.1 L1.1 R15.2 R16.2 SV1.5 U1.4 U1.11 U1.30 U1.49 U1.63 U1.74
X1: C24.2 IC3.7 JP36.2 R21.2 U5.1
X1CLK: C1.1 Q1.2 R7.2 U1.48
X1DOT: IC3.1 JP46.2 R31.2
X2: C25.2 IC4.7 JP37.2 R22.2 U5.3
X2CLK: C2.1 Q1.1 R7.1 U1.47
X2DOT: IC4.1 JP47.2 R29.2
X3: C26.2 IC5.7 JP38.2 R23.2 U5.8
X3DOT: IC5.1 JP48.2 R34.2
X4: C27.2 IC8.7 JP39.2 R24.2 U5.11
X4DOT: IC8.1 JP49.2 R49.2
X5: C28.2 IC6.7 JP7.2 R26.2 U6.1
X5DOT: IC6.1 JP42.2 R53.2
X6: C35.2 IC7.7 JP23.2 R79.2 U6.3
X6DOT: IC7.1 JP43.2 R75.2
X7: C38.2 IC9.7 JP34.2 R95.2 U6.8
X7DOT: IC9.1 JP44.2 R87.2
X8: C39.2 IC10.7 JP35.2 R97.2 U6.11
X8DOT: IC10.1 JP45.2 R91.2